# EAGLE board untitled (EAGLE 6.1)
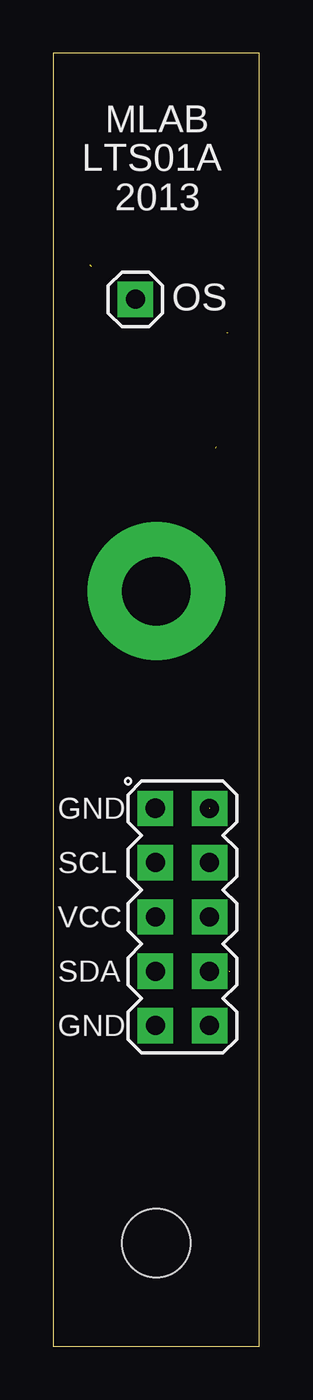
[diagram p0: board, top side]
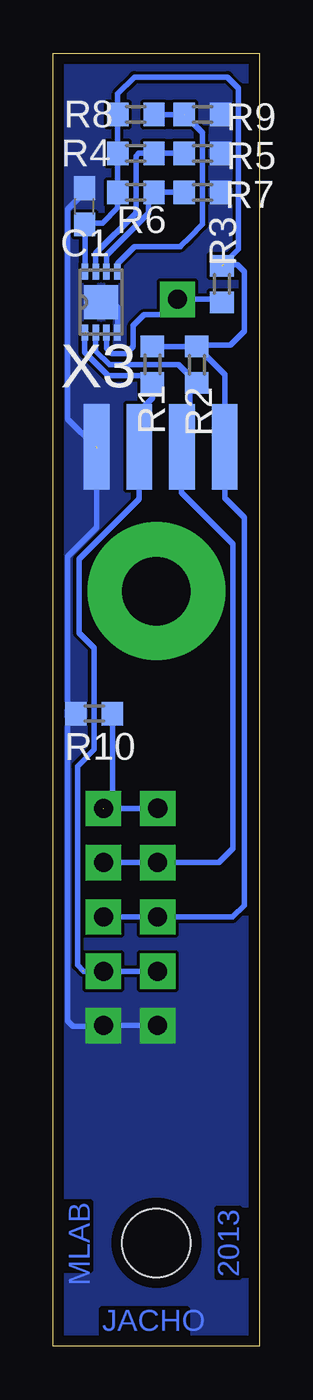
[diagram p1: board, bottom side, seen from below]

Size 9.65 x 60.45 mm. Coordinates in mm from the lower left corner, seen from the top.
Outline: 0,0 9.65,0 9.65,60.45 0,60.45 0,0
Copper layers (1*16): Top 0.035mm / dielectric 1.5mm / Bottom 0.035mm
Design rules: minimum track width 8mil, minimum drill 16mil, track to track 6mil, track to pad 6mil, pad to pad 6mil, via to via 6mil, smd to smd 6mil, copper to edge 20mil, drill to drill 8mil, minimum pad ring 10mil, minimum via ring 8mil, stop-mask expansion 4mil, vias tented up to drill 25mil, thermal gap 0mil
Holes 3.2 mm at 4.83,4.83

## Footprints (pad centres in the part's own frame; a part is rotated, then mirrored left to right if it is on the bottom)
C0603 = smd 1.1 x 1: 1 -0.85,0; 2 0.85,0
R0603 = smd 1 x 1.1: 1 -0.85,0; 2 0.85,0
MA05-2 = drill 0.914 pad 1.651 square: 1 -5.08,-1.27 | drill 0.889 pad 1.651 square: 2 -5.08,1.27; 3 -2.54,-1.27; 4 -2.54,1.27; 5 0,-1.27; 6 0,1.27; 7 2.54,-1.27; 8 2.54,1.27; 9 5.08,-1.27; 10 5.08,1.27
SMD_MA04-1 = smd 4 x 1.2: 1 0,3; 2 0,1; 3 0,-1; 4 0,-3
MA01-1 = drill 0.889 pad 1.651 square: 1 0,0
SROUB3M = drill 3.2 pad 6.452: P$1 0,0
TDFN8 = smd 0.762 x 0.305: 1 -1.422,0.762; 2 -1.422,0.254; 3 -1.422,-0.254; 4 -1.422,-0.762; 5 1.422,-0.762; 6 1.422,-0.254; 7 1.422,0.254; 8 1.422,0.762 | smd 1.6 x 1.6: 9 0,0

## Placement (x,y rotation side)
C1  100nF  [C0603]  8.19,53.3 90 bottom
R1  10k  [R0603]  5.01,45.9 90 bottom
R2  10k  [R0603]  2.93,45.9 90 bottom
R3  10k  [R0603]  1.76,49.67 90 bottom
R4  0R  [R0603]  5.79,55.78 0 bottom
R5  0R  [R0603]  2.67,55.78 0 bottom
R6  0R  [R0603]  5.79,53.96 0 bottom
R7  0R  [R0603]  2.67,53.96 0 bottom
R8  0R  [R0603]  5.79,57.6 0 bottom
R9  0R  [R0603]  2.67,57.6 0 bottom
R10  0R  [R0603]  7.74,29.58 180 bottom
SV1  [MA05-2]  6.04,20.07 270 top
SV2  [SMD_MA04-1]  4.63,42.06 270 bottom
SV4  [MA01-1]  3.84,48.95 0 top
X2  SROUB3M  [SROUB3M]  4.83,35.31 0 top
X3  [TDFN8]  7.42,48.82 90 bottom

## Library data of the parts
C1 R1-R10 = rcl
SV1 = moje_hrebinky; OC_FARNELL: unknown; OC_NEWARK: unknown
SV2 SV4 = moje_hrebinky
X2 = moje
X3 = moje_io

## Nets
A0: R4.2 R5.1 X3.7
A1: R6.2 R7.1 X3.6
A2: R8.2 R9.1 X3.5
GND: C1.2 R5.2 R7.2 R9.2 R10.2 SV1.9 SV1.10 SV2.4 X3.4 X3.9
N$1: R10.1 SV1.1 SV1.2
OS: R3.1 SV4.1 X3.3
SCL: R2.1 SV1.3 SV1.4 SV2.2 X3.2
SDA: R1.1 SV1.7 SV1.8 SV2.3 X3.1
VCC: C1.1 R1.2 R2.2 R3.2 R4.1 R6.1 R8.1 SV1.5 SV1.6 SV2.1 X3.8

## Tracks (layer width: path | path; a pad name or v marks a point on that pad's centre or on a via)
A0
  Bottom 0.254: R5.1 R4.2 5.66,55.78 5.79,55.65 5.79,52.98 7.67,51.1 X3.7
A1
  Bottom 0.254: 4.95,53.76 4.82,53.89 4.88,53.96 | 4.88,53.96 R7.1 | 4.88,53.96 R6.2 5.21,53.69 5.21,52.98 7.16,51.03 X3.6
A2  (1 unrouted)
  Bottom 0.254: X3.5 6.65,50.62 5.86,51.42 3.71,51.42 3.65,51.49 3.29,51.84 2.67,52.46 2.67,56.75 R9.1 | R9.1 R8.2
GND  (1 unrouted)
  Bottom 0.254: 7.48,42.21 SV2.4 7.63,38.27 8.98,36.93 8.98,15.22 8.72,14.96 7.35,14.96 7.32,14.99 SV1.9 | C1.2 8.19,53.96 8.98,53.18 8.98,43.36 7.61,42 | X3.4 6.65,48.58 6.7,48.63
  pour Bottom: 0.01,68.3 10.17,68.3 9.91,-0.25 -0.25,-0.25
N$1  (1 unrouted)
  Bottom 0.254: SV1.1 6.77,25.15 | 6.77,25.15 7.34,25.15 7.42,25.23 | R10.1 6.89,25.27 6.77,25.15
OS
  Bottom 0.254: X3.3 7.16,46.68 6.9,46.42 6.25,46.42 5.92,46.74 5.92,47.72 5.4,48.24 4.56,48.24 SV4.1 1.83,48.95 1.79,48.92 1.76,48.89 | 1.76,48.89 1.7,48.82 | R3.1 1.76,48.89
SCL
  Bottom 0.254: SV1.4 SV1.3 1.91,22.61 1.24,23.28 1.24,37.51 3.65,39.92 3.65,41.09 3.52,41.22 3.52,41.95 SV2.2 3.63,42.92 3.26,43.3 3.26,44.72 R2.1 3.78,45.9 7.03,45.9 7.67,46.54 X3.2
SDA  (2 unrouted)
  Bottom 0.254: R1.1 | R1.1 5.01,44.33 5.79,43.56 5.79,42.22 SV2.3 5.63,39.62 8.46,36.8 8.46,33.35 7.74,32.64 7.74,27.89 8.52,27.11 8.52,17.82 8.26,17.56 | 8.13,47.39 8.2,47.33 8.2,46.48 7.09,45.38 5.01,45.38 | SV1.7 SV1.8 8.23,17.53 | 5.01,45.38 4.88,45.38 | R1.1 5.01,45.37 5.01,45.38
VCC  (1 unrouted)
  Bottom 0.254: R2.2 R1.2 | R2.2 1.63,45.44 SV2.1 1.63,39.66 0.72,38.75 0.72,20.61 1.27,20.07 SV1.5 SV1.6 | 8.2,50.24 X3.8 8.18,52.35 | R6.1 R4.1 | R4.1 R8.1 6.64,58.57 5.86,59.35 1.5,59.35 0.98,58.83 0.98,51.29 1.7,50.58 1.05,50.58 0.72,50.25 0.72,47.46 1.37,46.81 2.8,46.81 3,46.61 3,46.68 R2.2 | R6.1 R4.1 | 8.18,52.35 8,52.53 7.35,52.53 6.64,53.24 R6.1 | 8.18,52.35 8.18,52.44 C1.1

## Text on the board
Bottom: 2013 | MLAB | JACHO
tPlace: MLAB | LTS01A | 2013 | OS | GND | SCL | VCC | SDA | GND